# Altium PCB Secondary_MCU_Lidar_Robot.PcbDoc
Units mm, origin at the board's own origin, x right, y up, seen from the top; angles counter-clockwise.
Board outline 90.93 x 99.57 mm, 2 copper layers (Top Layer, Bottom Layer); 12 components, 36 nets, 196 pads, 15 vias.
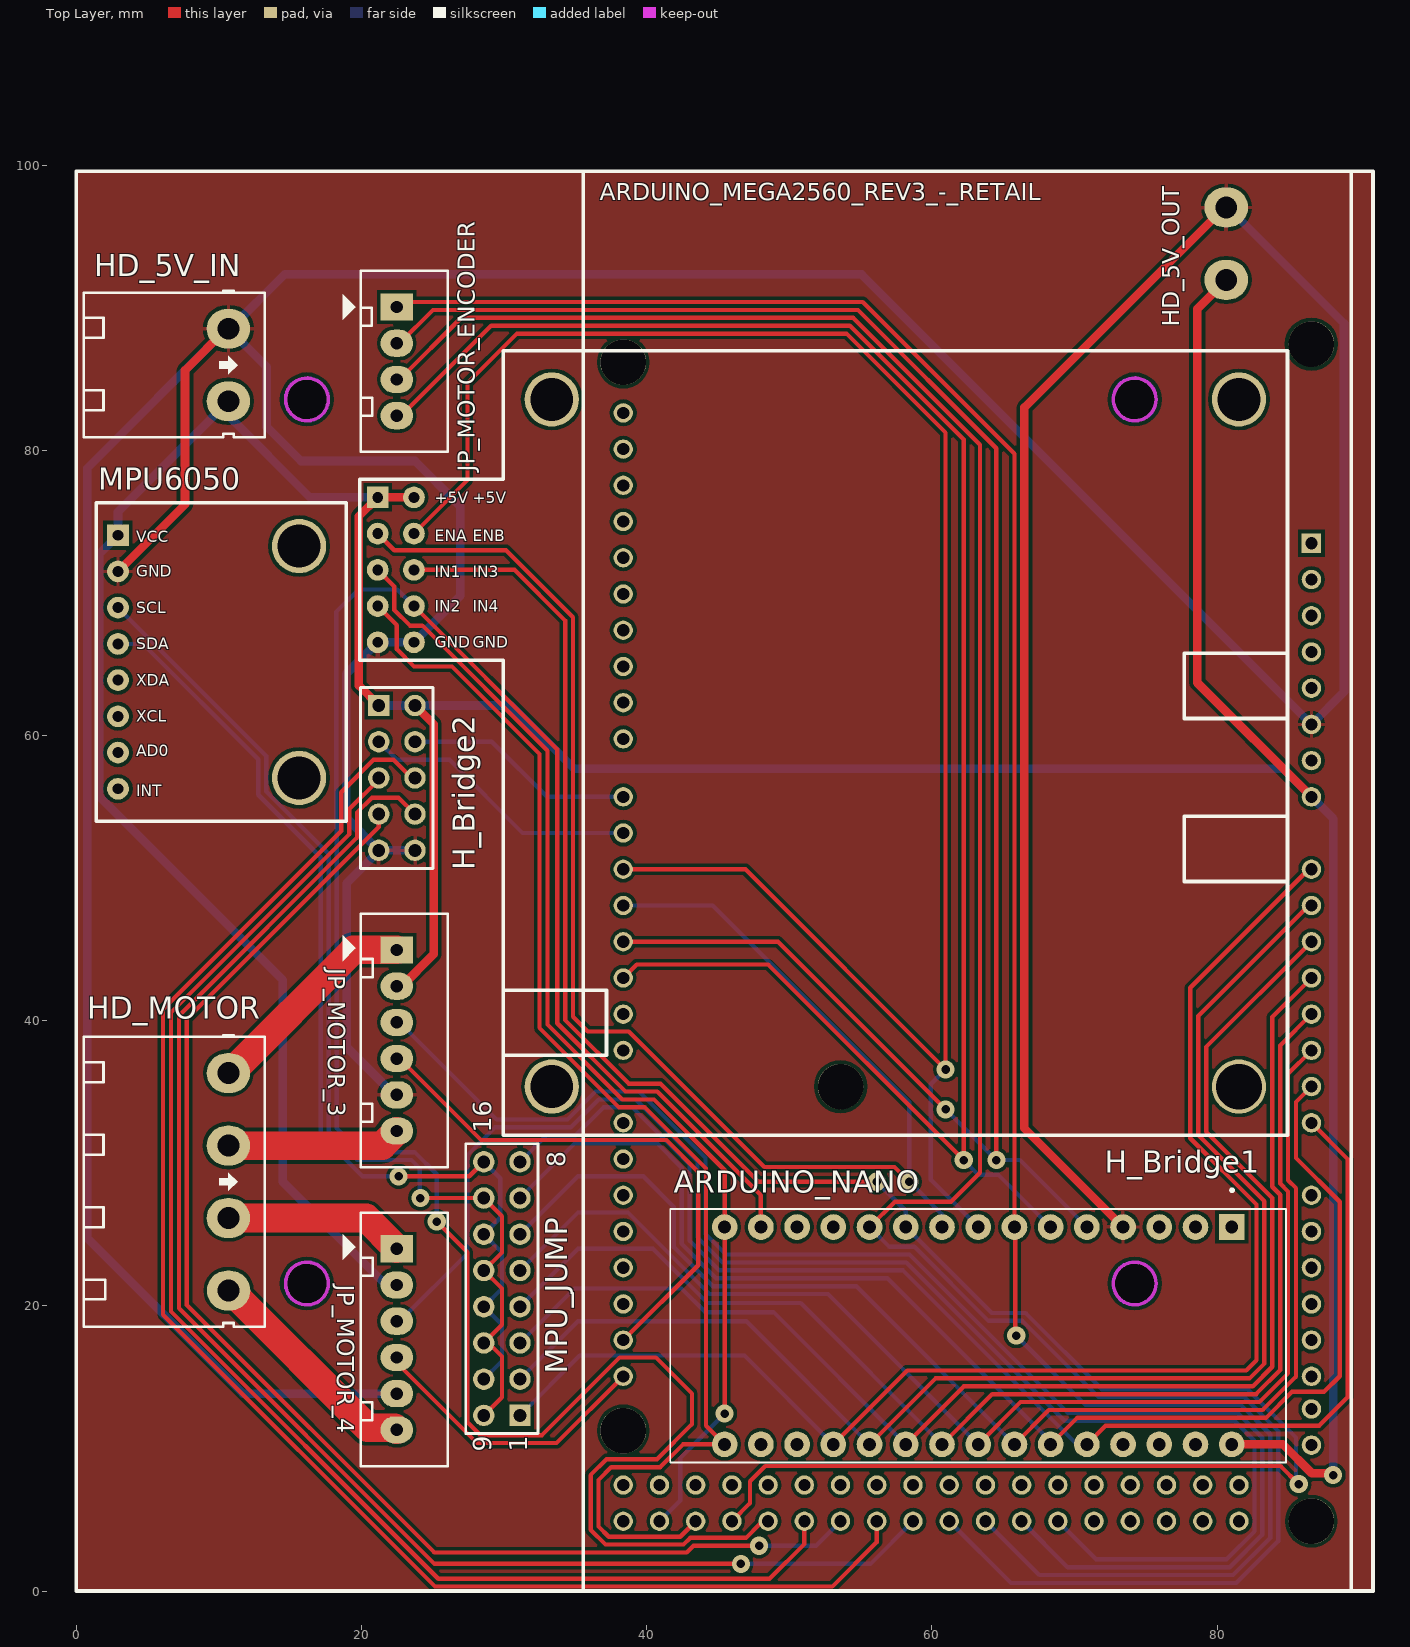
[diagram p0: Top Layer view]
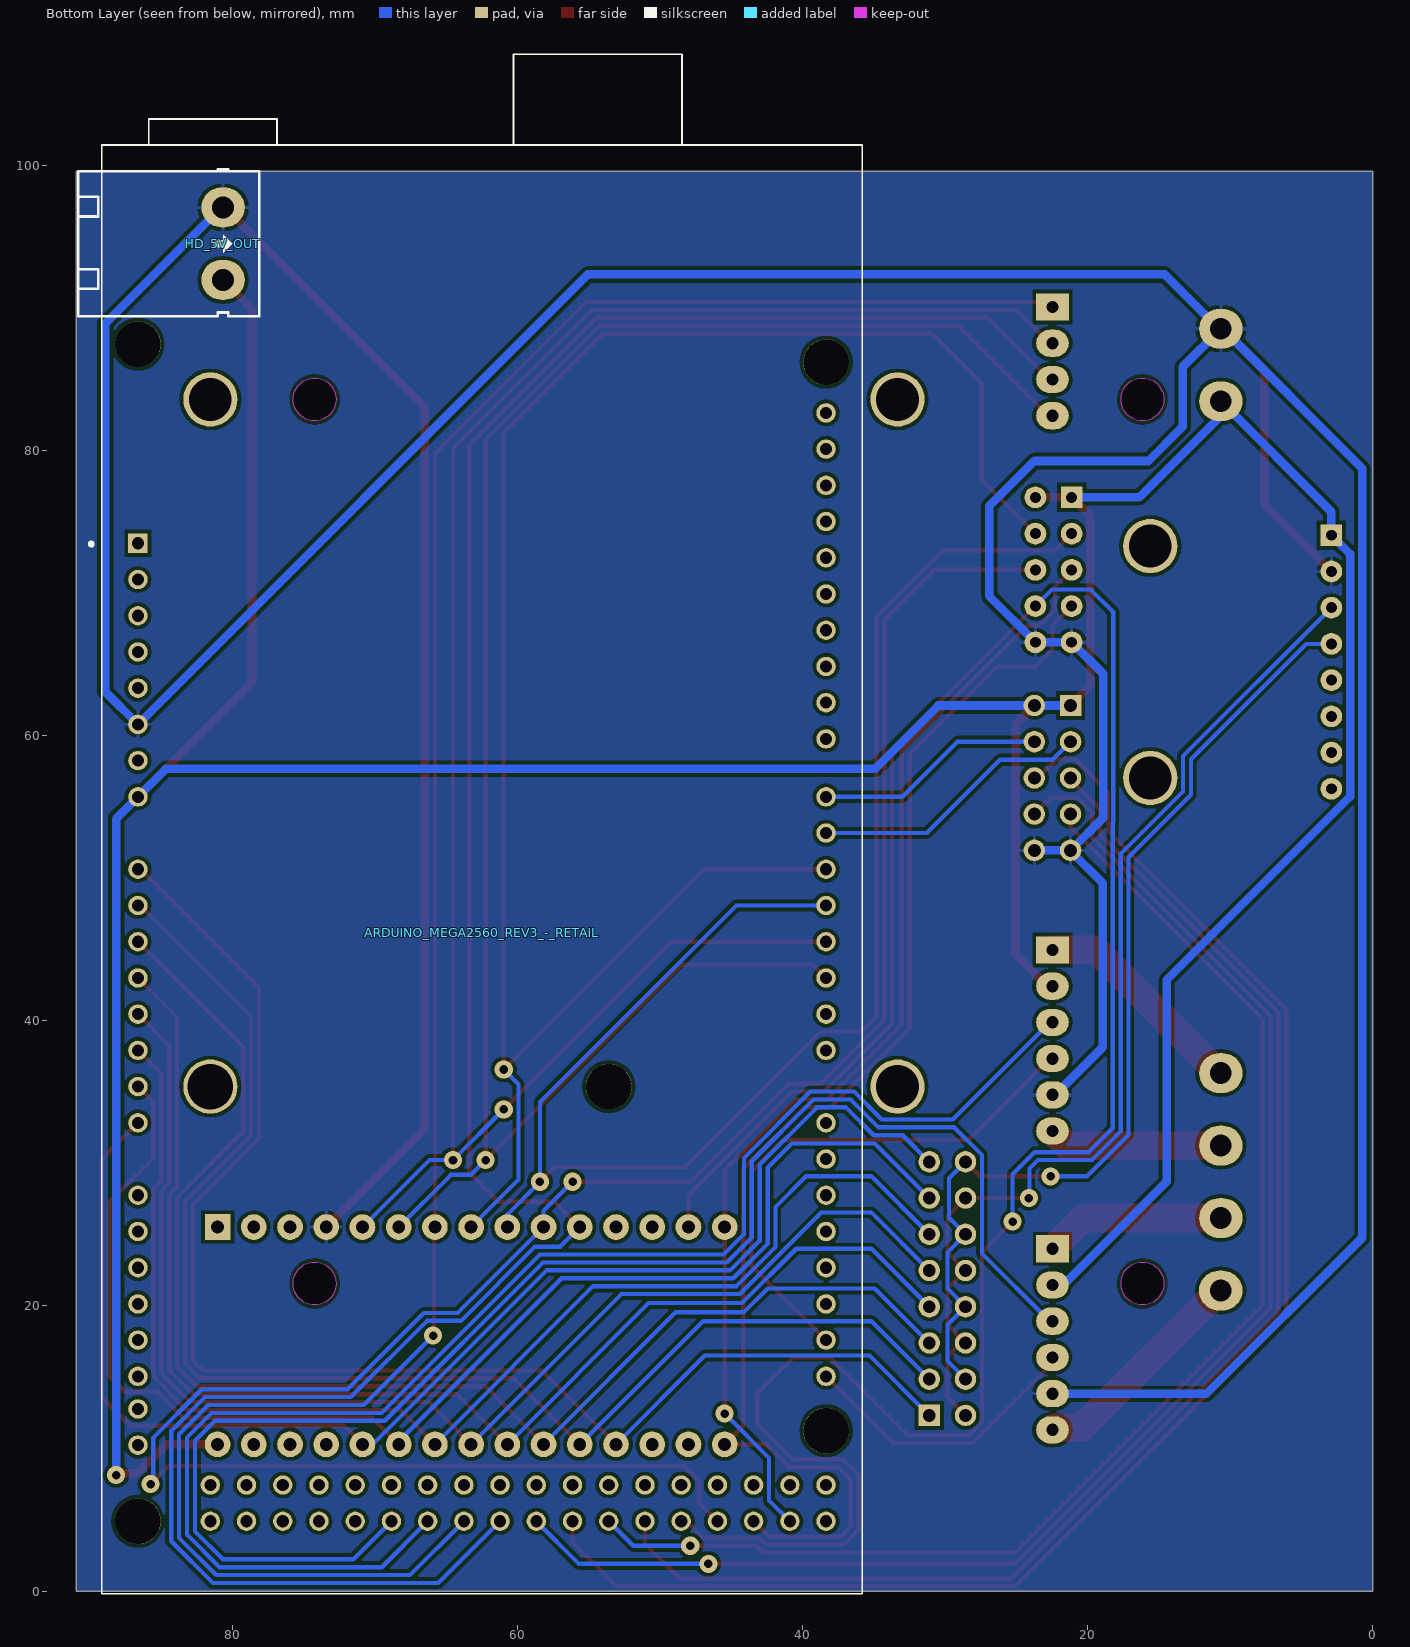
[diagram p1: Bottom Layer view, seen from below]

## Layer stack, top to bottom
Top Solder: solder mask 0.0102, Solder Resist, Dk 3.5
Top Layer: signal copper 0.0356
Dielectric 1: dielectric 0.32, FR-4, Dk 4.8
Bottom Layer: signal copper 0.0356
Bottom Solder: solder mask 0.0102, Solder Resist, Dk 3.5

## Board outline
0,0 90.932,0 90.932,99.568 0,99.568
cut-out: 72.721,83.566 ccw(c74.221,83.566) 74.221,82.066 ccw(c74.221,83.566) 75.721,83.566 ccw(c74.221,83.566) 74.221,85.066 ccw(c74.221,83.566)
cut-out: 14.671,83.566 ccw(c16.171,83.566) 16.171,82.066 ccw(c16.171,83.566) 17.671,83.566 ccw(c16.171,83.566) 16.171,85.066 ccw(c16.171,83.566)
cut-out: 14.671,21.566 ccw(c16.171,21.566) 16.171,20.066 ccw(c16.171,21.566) 17.671,21.566 ccw(c16.171,21.566) 16.171,23.066 ccw(c16.171,21.566)
cut-out: 72.721,21.566 ccw(c74.221,21.566) 74.221,20.066 ccw(c74.221,21.566) 75.721,21.566 ccw(c74.221,21.566) 74.221,23.066 ccw(c74.221,21.566)

## Design rules (kind name [scope] priority, off if disabled: settings)
Clearance [All] p1: gap=0.254 ignorepadtopadclearanceinfootprint=FALSE except(0: Arc-Hole Track-Hole SMDPad-Hole THPad-Hole Via-Hole Fill-Hole Poly-Hole Region-Hole Text-Hole)
PolygonConnect [All] p1: connectstyle=Relief reliefconductorwidth=0.254 reliefentries=4 polygonreliefangle="90 Angle" airgapwidth=0.254
RoutingVias [All] p1: holewidth=0.6 width=1.27 viastyle="Through Hole" minholewidth=0.3 minwidth=1.27 maxholewidth=0.711 maxwidth=1.27
SolderMaskExpansion [All] p1: expansion=0.102
Width [All] p1: maxlimit=0.6 minlimit=0.15 preferedwidth=0.3
30 further rules are at their usual default settings.

## Components (designator, comment, footprint, x,y, rotation, side; value= is the part's Value field where it differs from the comment)
ARDUINO_MEGA2560_REV3_-_RETAIL "ARDUINO_MEGA2560_REV3_-_RETAIL" ARDUINO_MEGA2560_REV3_-_RETAIL 62.484,50.616 r180 bottom
ARDUINO_NANO "ARDUINO_NANO" SHIELD_ARDUINO_NANO 63.246,17.907 r270 top
H_Bridge1 "H_Bridge" XY-160D 29.944,31.976 r0 top
H_Bridge2 "Header 5X2A" HDR2X5_CEN 21.209,62.103 r270 top
HD_5V_IN "Header 2" HED2T 10.668,88.519 r270 top
HD_5V_OUT "Header 2" HED2T 80.645,97.028 r270 bottom
HD_MOTOR "Header 4" HED4T 10.668,36.322 r270 top
JP_MOTOR_3 "JP6" CON6 22.479,44.958 r270 top value="Connector 6"
JP_MOTOR_4 "JP6" CON6 22.479,24.003 r270 top value="Connector 6"
JP_MOTOR_ENCODER "JP4" CON4 22.479,90.043 r270 top value="Connector 4"
MPU6050 "MPU6050" MPU6050 1.397,76.327 r270 top
MPU_JUMP "Header 8X2A" HDR2X8_CEN 31.115,12.319 r90 top

## Footprints (in the part's own frame and the unit in brackets; to place one, negate y for a bottom-side part, rotate by r counter-clockwise, add the part's x,y. Pads: shape width x height; smd on the part's side, far side on the other; paste and mask are expansions set on the pad)
ARDUINO_MEGA2560_REV3_-_RETAIL [mm]
  round 1.358 hole 0.85: 0(24.13,-12.7) 1(24.13,-10.16) 2(24.13,-7.62) 3(24.13,-5.08) 3V3(-24.13,15.24) 4(24.13,-2.54) 5(24.13,0) 5V_1(-24.13,12.7) 5V_2(24.13,-43.18) 5V_3(24.13,-45.72) 6(24.13,2.54) 7(24.13,5.08) 8(24.13,9.144) 9(24.13,11.684) 10(24.13,14.224) 11(24.13,16.764) 12(24.13,19.304) 13(24.13,21.844) 14(24.13,-17.78) 15(24.13,-20.32) 16(24.13,-22.86) 17(24.13,-25.4) 18(24.13,-27.94) 19(24.13,-30.48) 20(24.13,-33.02) 21(24.13,-35.56) 22(21.59,-43.18) 23(21.59,-45.72) 24(19.05,-43.18) 25(19.05,-45.72) 26(16.51,-43.18) 27(16.51,-45.72) 28(13.97,-43.18) 29(13.97,-45.72) 30(11.43,-43.18) 31(11.43,-45.72) 32(8.89,-43.18) 33(8.89,-45.72) 34(6.35,-43.18) 35(6.35,-45.72) 36(3.81,-43.18) 37(3.81,-45.72) 38(1.27,-43.18) 39(1.27,-45.72) 40(-1.27,-43.18) 41(-1.27,-45.72) 42(-3.81,-43.18) 43(-3.81,-45.72) 44(-6.35,-43.18) 45(-6.35,-45.72) 46(-8.89,-43.18) 47(-8.89,-45.72) 48(-11.43,-43.18) 49(-11.43,-45.72) 50(-13.97,-43.18) 51(-13.97,-45.72) 52(-16.51,-43.18) 53(-16.51,-45.72) AD0(-24.13,0) AD1(-24.13,-2.54) AD2(-24.13,-5.08) AD3(-24.13,-7.62) AD4(-24.13,-10.16) AD5(-24.13,-12.7) AD6(-24.13,-15.24) AD7(-24.13,-17.78) AD8(-24.13,-22.86) AD9(-24.13,-25.4) AD10(-24.13,-27.94) AD11(-24.13,-30.48) AD12(-24.13,-33.02) AD13(-24.13,-35.56) AD14(-24.13,-37.846) AD15(-24.13,-40.386) AREF(24.13,26.924) GND1(-24.13,10.16) GND2(-24.13,7.62) GND3(24.13,24.384) GND4(-19.05,-43.18) GND5(-19.05,-45.72) IOREF(-24.13,20.32) RESET(-24.13,17.78) SCL(24.13,32.004) SDA(24.13,29.464) VIN(-24.13,5.08)
  rect 1.358x1.358 hole 0.85: NC(-24.13,22.86)
  round 3.2 hole 3.2 unplated: ""(-24.13,-45.72) ""(-24.13,36.83) ""(-19.05,-15.24) ""(8.89,-15.24) ""(24.13,-39.37) ""(24.13,35.56)
  silkscreen extent -27.52,-50.8 26.67,57.15
CON4 [mil] "CON4"
  rect 75x90 hole 34: 1(0,0)
  oval 75x90 hole 34: 2(100,0) 3(200,0) 4(300,0)
  silkscreen extent -100,-150 400,140, body extent -90,-90 398,136, height 276
CON6 [mil] "CON6"
  rect 75x90 hole 34: 1(0,0)
  oval 75x90 hole 34: 2(100,0) 3(200,0) 4(300,0) 5(400,0) 6(500,0)
  silkscreen extent -100,-150 600,140
HDR2X5_CEN [mm] "Connector; Header; 5x2 Position"
  rect 1.5x1.5 hole 0.9: 1(0,0)
  round 1.5 hole 0.9: 2(2.54,0) 3(5.08,0) 4(7.62,0) 5(10.16,0) 6(0,2.54) 7(2.54,2.54) 8(5.08,2.54) 9(7.62,2.54) 10(10.16,2.54)
  silkscreen extent -1.27,-1.27 11.43,3.81, body extent -1.27,-1.27 11.43,3.81, height 7
HDR2X8_CEN [mm] "Connector; Header; 8x2 Position"
  rect 1.5x1.5 hole 0.9: 1(0,0)
  round 1.5 hole 0.9: 2(2.54,0) 3(5.08,0) 4(7.62,0) 5(10.16,0) 6(12.7,0) 7(15.24,0) 8(17.78,0) 9(0,2.54) 10(2.54,2.54) 11(5.08,2.54) 12(7.62,2.54) 13(10.16,2.54) 14(12.7,2.54) 15(15.24,2.54) 16(17.78,2.54)
  silkscreen extent -1.27,-1.27 19.05,3.81, body extent -1.27,-1.27 19.05,3.81, height 1.5
HED2T [mil] "Header 2, 2 pin, hight 300mil, Pin to Pin 200, Colour Green"
  oval 110x120 hole 60: 1(0,0) 2(200,0)
  silkscreen extent -105,-400 300,100, body extent -97,-399 297,73, height 334
HED4T [mil] "Header 4, 4 pin, hight 300mil, Pin to Pin 200, Colour Green"
  oval 110x120 hole 60: 1(0,0) 2(200,0) 3(400.06,0.06) 4(600.39,0.39)
  silkscreen extent -105,-400 700,100, body extent -87,-406 690,66, height 334
MPU6050 [mil]
  round 60 hole 30: 1(790,60) 2(690,60) 3(590,60) 4(490,60) 5(390,60) 6(290,60) 7(190,60)
  rect 60x60 hole 30: 8(90,60)
  round 149.61 hole 118.11: 13(120,560) 14(760,560)
  silkscreen extent 0,0 880,690
SHIELD_ARDUINO_NANO [mm]
  rect 1.8x1.8 hole 0.9: 1(-7.62,17.78)
  round 1.8 hole 0.9: 2(-7.62,15.24) 3(-7.62,12.7) 4(-7.62,10.16) 5(-7.62,7.62) 6(-7.62,5.08) 7(-7.62,2.54) 8(-7.62,0) 9(-7.62,-2.54) 10(-7.62,-5.08) 11(-7.62,-7.62) 12(-7.62,-10.16) 13(-7.62,-12.7) 14(-7.62,-15.24) 15(-7.62,-17.78) 16(7.62,-17.78) 17(7.62,-15.24) 18(7.62,-12.7) 19(7.62,-10.16) 20(7.62,-7.62) 21(7.62,-5.08) 22(7.62,-2.54) 23(7.62,0) 24(7.62,2.54) 25(7.62,5.08) 26(7.62,7.62) 27(7.62,10.16) 28(7.62,12.7) 29(7.62,15.24) 30(7.62,17.78)
  silkscreen extent -10.3,-21.59 8.89,21.59
XY-160D [mm] "H BRIDGE"
  rect 1.524x1.524 hole 0.762: 1(-8.81,44.72)
  round 1.524 hole 0.762: 2(-8.81,42.18) 3(-8.81,39.64) 4(-8.81,37.1) 5(-8.81,34.56) 6(-6.27,44.72) 7(-6.27,42.18) 8(-6.27,39.64) 9(-6.27,37.1) 10(-6.27,34.56)
  round 3.8 hole 3: 11(3.4,51.59) 12(3.4,3.4) 13(51.59,51.59) 14(51.59,3.4)
  silkscreen extent -10.08,0 54.99,54.99

## Part data
ARDUINO_MEGA2560_REV3_-_RETAIL: "Dev.kit: Arduino; SPI, TWI, UART; ICSP, USB B, pin strips, supply", Package=None, Availability=Unavailable, MF=Arduino, MP="ARDUINO MEGA2560 REV3 - RETAIL", Price=None, SnapEDA_Link=https://www.snapeda.com/parts/ARDUINO%20MEGA2560%20REV3%20-%20RETAIL/Arduino/view-part/1128250/?ref=snap
ARDUINO_NANO: "ATSAMD21G18A Arduino Nano 33 IoT SAM D ARM® Cortex®-M0+ MCU 32-Bit Embedded Evaluation Board", Package=None, Availability=Unavailable, MF=Arduino, MP="ARDUINO NANO", Price=None, SnapEDA_Link=https://www.snapeda.com/parts/ARDUINO%20NANO/Arduino/view-part/1128261/?ref=snap
H_Bridge1: library part "Driver H Bridge XY160D"
H_Bridge2: "Header, 5-Pin, Dual row", LatestRevisionDate=17-Jul-2002, LatestRevisionNote="Re-released for DXP Platform.", Publisher="Altium Limited"
HD_5V_IN HD_5V_OUT: library part Hed2, "Header 2 (Green)"
HD_MOTOR: library part Hed4, "Header 4 (Green)"
JP_MOTOR_3 JP_MOTOR_4: library part Con6, "Connector 6"
JP_MOTOR_ENCODER: library part Con4, "Connector 4"
MPU_JUMP: "Header, 8-Pin, Dual row", LatestRevisionDate=17-Jul-2002, LatestRevisionNote="Re-released for DXP Platform.", Publisher="Altium Limited"

## Via types
v1: diameter 1.27, hole 0.6, Top Layer to Bottom Layer, 15 vias

## Nets (pads, with @x,y where several pads share a name; then routed paths per layer and width w, separated by ;. In a path a pad name is that pad's centre, name@x,y a point inside that pad or via, vN(x,y) a via of type N, cw(c..) or ccw(c..) an arc to the next point about the centre after c; other vN are vias at no path point)
5V: ARDUINO_MEGA2560_REV3_-_RETAIL.VIN ARDUINO_NANO.30 H_Bridge1.1 H_Bridge1.6 H_Bridge2.1 H_Bridge2.6 HD_5V_IN.2 HD_5V_OUT.2 JP_MOTOR_3.2 JP_MOTOR_4.2 MPU6050.8 | length 293.1
  Top Layer w0.6: H_Bridge2.1 19.818,63.494 19.818,75.38 H_Bridge1.1 H_Bridge1.6 ; JP_MOTOR_3.2 22.818,42.418 25.053,44.653 25.053,60.799 H_Bridge2.6 ; HD_5V_OUT.2 78.613,89.916 78.613,63.697 ARDUINO_MEGA2560_REV3_-_RETAIL.VIN ; ARDUINO_NANO.30 84.612,10.287 86.643,8.256 88.01,8.256 v1(88.138,8.128)
  Bottom Layer w0.6: H_Bridge1.1 16.395,76.696 10.668,82.423 HD_5V_IN.2 2.921,75.692 MPU6050.8 1.605,72.725 1.605,55.716 14.478,42.843 14.478,28.702 21.717,21.463 JP_MOTOR_4.2 ; H_Bridge2.1 H_Bridge2.6 30.48,62.103 34.925,57.658 84.652,57.658 ARDUINO_MEGA2560_REV3_-_RETAIL.VIN 88.138,54.172 88.138,10.01 v1(88.138,8.128)
A0: ARDUINO_MEGA2560_REV3_-_RETAIL.AD0 ARDUINO_NANO.19 MPU_JUMP.1 | length 98.4
  Top Layer w0.3: ARDUINO_NANO.19 58.268,15.469 82.047,15.469 82.761,16.183 82.761,27.108 78.122,31.747 78.122,42.308 86.43,50.616 ARDUINO_MEGA2560_REV3_-_RETAIL.AD0
  Bottom Layer w0.3: MPU_JUMP.1 35.309,16.513 46.86,16.513 ARDUINO_NANO.19
A1: ARDUINO_MEGA2560_REV3_-_RETAIL.AD1 ARDUINO_NANO.20 MPU_JUMP.2 | length 97.2
  Top Layer w0.3: ARDUINO_NANO.20 60.254,14.915 82.277,14.915 83.315,15.953 83.315,27.338 78.676,31.977 78.676,40.322 86.43,48.076 ARDUINO_MEGA2560_REV3_-_RETAIL.AD1
  Bottom Layer w0.3: MPU_JUMP.2 35.179,18.923 46.99,18.923 ARDUINO_NANO.20
A2: ARDUINO_MEGA2560_REV3_-_RETAIL.AD2 ARDUINO_NANO.21 MPU_JUMP.3 | length 95.9
  Top Layer w0.3: ARDUINO_NANO.21 62.24,14.361 82.506,14.361 83.869,15.724 83.869,27.567 79.23,32.206 79.23,38.152 ARDUINO_MEGA2560_REV3_-_RETAIL.AD2
  Bottom Layer w0.3: MPU_JUMP.3 34.935,21.219 42.446,21.219 44.107,19.558 48.895,19.558 ARDUINO_NANO.21
A3: ARDUINO_MEGA2560_REV3_-_RETAIL.AD3 ARDUINO_NANO.22 MPU_JUMP.4 | length 91.7
  Top Layer w0.3: ARDUINO_NANO.22 64.226,13.807 82.736,13.807 84.423,15.494 84.423,27.797 83.869,28.351 83.869,40.251 ARDUINO_MEGA2560_REV3_-_RETAIL.AD3
  Bottom Layer w0.3: MPU_JUMP.4 35.179,24.003 40.445,24.003 44.255,20.193 50.8,20.193 ARDUINO_NANO.22
A4: ARDUINO_MEGA2560_REV3_-_RETAIL.AD4 ARDUINO_NANO.23 MPU_JUMP.5 | length 90.7
  Top Layer w0.3: ARDUINO_NANO.23 66.212,13.253 82.965,13.253 84.977,15.265 84.977,28.026 84.423,28.58 84.423,38.265 ARDUINO_MEGA2560_REV3_-_RETAIL.AD4
  Bottom Layer w0.3: MPU_JUMP.5 35.179,26.543 38.689,26.543 44.404,20.828 52.705,20.828 ARDUINO_NANO.23
A5: ARDUINO_MEGA2560_REV3_-_RETAIL.AD5 ARDUINO_NANO.24 MPU_JUMP.6 | length 91.3
  Top Layer w0.3: ARDUINO_NANO.24 68.198,12.699 83.194,12.699 85.531,15.036 85.531,28.256 84.977,28.81 84.977,36.279 ARDUINO_MEGA2560_REV3_-_RETAIL.AD5
  Bottom Layer w0.3: MPU_JUMP.6 35.179,29.083 39.751,29.083 41.899,26.935 41.899,24.116 44.633,21.382 54.691,21.382 ARDUINO_NANO.24
A6: ARDUINO_MEGA2560_REV3_-_RETAIL.AD6 ARDUINO_NANO.25 MPU_JUMP.7 | length 95.1
  Top Layer w0.3: ARDUINO_NANO.25 70.184,12.145 83.424,12.145 85.249,13.97 87.503,13.97 88.6,15.067 88.6,27.302 85.531,30.371 85.531,34.293 ARDUINO_MEGA2560_REV3_-_RETAIL.AD6
  Bottom Layer w0.3: MPU_JUMP.7 34.935,31.379 40.757,31.379 42.453,29.683 42.453,24.345 44.862,21.936 56.89,21.936 68.326,10.5 ARDUINO_NANO.25
A7: ARDUINO_MEGA2560_REV3_-_RETAIL.AD7 ARDUINO_NANO.26 MPU_JUMP.8 | length 94.2
  Top Layer w0.3: ARDUINO_NANO.26 72.17,11.591 87.156,11.591 89.154,13.589 89.154,30.296 ARDUINO_MEGA2560_REV3_-_RETAIL.AD7
  Bottom Layer w0.3: MPU_JUMP.8 32.98,31.964 35.012,31.964 36.967,33.919 39,33.919 43.007,29.912 43.007,24.575 45.092,22.49 57.967,22.49 70.17,10.287 ARDUINO_NANO.26
C1/A1: ARDUINO_MEGA2560_REV3_-_RETAIL.2 ARDUINO_NANO.6 JP_MOTOR_ENCODER.4 | length 134.2
  Top Layer w0.3: JP_MOTOR_ENCODER.4 22.779,82.423 29.09,88.734 54.247,88.734 62.23,80.751 62.23,38.308 v1(62.23,30.226) 48.514,43.942 39.3,43.942 ARDUINO_MEGA2560_REV3_-_RETAIL.2
  Bottom Layer w0.3: v1(62.23,30.226) 63.269,29.187 64.666,29.187 ARDUINO_NANO.6
C1/A2: ARDUINO_MEGA2560_REV3_-_RETAIL.3 ARDUINO_NANO.5 JP_MOTOR_ENCODER.2 | length 137.7
  Top Layer w0.3: JP_MOTOR_ENCODER.2 22.669,87.503 25.009,89.842 54.811,89.842 64.516,80.137 v1(64.516,30.226) ; ARDUINO_MEGA2560_REV3_-_RETAIL.3 49.206,45.536 v1(60.96,33.782)
  Bottom Layer w0.3: v1(60.96,33.782) v1(64.516,30.226) 66.167,30.226 ARDUINO_NANO.5
C1/A3: ARDUINO_MEGA2560_REV3_-_RETAIL.20 JP_MOTOR_3.4 | length 38.4
  Top Layer w0.3: JP_MOTOR_3.4 22.669,37.338 28.384,31.623 41.381,31.623 43.608,29.396 43.608,22.85 ARDUINO_MEGA2560_REV3_-_RETAIL.20
C1/A4: ARDUINO_MEGA2560_REV3_-_RETAIL.21 JP_MOTOR_4.4 | length 20.5
  Top Layer w0.3: JP_MOTOR_4.4 22.479,16 28.1,10.379 33.677,10.379 ARDUINO_MEGA2560_REV3_-_RETAIL.21
C2/B1: ARDUINO_MEGA2560_REV3_-_RETAIL.39 ARDUINO_NANO.11 JP_MOTOR_ENCODER.3 | length 175.1
  Top Layer w0.3: JP_MOTOR_ENCODER.3 22.669,84.963 26.995,89.288 54.476,89.288 63.373,80.391 63.373,33.147 63.373,29.337 61.341,27.305 57.404,27.305 ARDUINO_NANO.11
  Bottom Layer w0.3: ARDUINO_NANO.11 57.001,24.152 58.758,24.152 63.964,18.946 66.343,18.946 71.689,13.6 81.908,13.6 84.279,11.229 84.279,3.497 81.346,0.564 65.546,0.564 ARDUINO_MEGA2560_REV3_-_RETAIL.39
C2/B2: ARDUINO_MEGA2560_REV3_-_RETAIL.41 ARDUINO_NANO.7 JP_MOTOR_ENCODER.1 | length 160.3
  Top Layer w0.3: JP_MOTOR_ENCODER.1 22.832,90.396 55.146,90.396 65.786,79.756 ARDUINO_NANO.7 65.849,25.464 65.849,17.971 v1(65.913,17.907)
  Bottom Layer w0.3: ARDUINO_MEGA2560_REV3_-_RETAIL.41 67.532,1.118 81.116,1.118 83.725,3.727 83.725,10.999 81.678,13.046 70.774,13.046 v1(65.913,17.907)
C2/B3: ARDUINO_MEGA2560_REV3_-_RETAIL.43 JP_MOTOR_3.3 | length 103.5
  Bottom Layer w0.3: JP_MOTOR_3.3 22.669,39.878 29.475,33.072 34.448,33.072 36.403,35.027 39.459,35.027 44.115,30.371 44.115,25.034 45.551,23.598 58.426,23.598 69.532,12.492 81.449,12.492 83.171,10.77 83.171,3.956 80.887,1.672 69.518,1.672 ARDUINO_MEGA2560_REV3_-_RETAIL.43
C2/B4: ARDUINO_MEGA2560_REV3_-_RETAIL.45 JP_MOTOR_4.3 | length 105.7
  Bottom Layer w0.3: JP_MOTOR_4.3 22.669,18.923 27.421,23.675 27.421,30.577 29.362,32.518 34.677,32.518 36.632,34.473 39.23,34.473 43.561,30.142 43.561,24.804 45.321,23.044 58.197,23.044 69.303,11.938 81.219,11.938 82.617,10.54 82.617,4.186 80.657,2.226 71.504,2.226 ARDUINO_MEGA2560_REV3_-_RETAIL.45
GND: ARDUINO_MEGA2560_REV3_-_RETAIL.GND1 ARDUINO_NANO.4 H_Bridge1.5 H_Bridge1.10 H_Bridge2.5 H_Bridge2.10 HD_5V_IN.1 HD_5V_OUT.1 JP_MOTOR_3.5 JP_MOTOR_4.5 MPU6050.7 | length 401.9
  Top Layer w0.6: MPU6050.7 7.62,76.2 7.62,85.598 10.541,88.519 HD_5V_IN.1 ; ARDUINO_NANO.4 66.49,32.443 66.49,83 80.518,97.028 HD_5V_OUT.1
  Bottom Layer w0.6: HD_5V_IN.1@10.795,88.519 14.605,92.329 55.061,92.329 ARDUINO_MEGA2560_REV3_-_RETAIL.GND1 88.9,63.062 88.9,88.9 80.772,97.028 HD_5V_OUT.1 ; JP_MOTOR_4.5 11.684,13.843 0.751,24.776 0.751,78.729 10.541,88.519 HD_5V_IN.1 13.335,85.852 13.335,81.661 15.748,79.248 23.749,79.248 26.924,76.073 26.924,69.786 H_Bridge1.10 H_Bridge1.5 18.923,64.325 18.923,54.229 H_Bridge2.5 ; JP_MOTOR_3.5 22.288,34.798 18.957,38.13 18.957,49.644 21.209,51.896 H_Bridge2.5 ; H_Bridge2.10 H_Bridge2.5
M1_1: ARDUINO_MEGA2560_REV3_-_RETAIL.23 ARDUINO_NANO.15 H_Bridge1.3 | length 80.5
  Top Layer w0.3: H_Bridge1.3 22.3,70.45 22.3,68.801 23.399,67.702 24.265,67.702 33.039,58.928 33.039,39.723 38.289,34.473 40.505,34.473 45.466,29.512 ARDUINO_NANO.15 v1(45.466,12.446)
  Bottom Layer w0.3: ARDUINO_MEGA2560_REV3_-_RETAIL.23 42.351,6.353 42.351,9.331 v1(45.466,12.446)
M1_2: ARDUINO_MEGA2560_REV3_-_RETAIL.25 ARDUINO_NANO.16 H_Bridge1.4 | length 91.9
  Top Layer w0.3: H_Bridge1.4 22.479,67.731 22.479,66.04 23.687,64.832 26.351,64.832 32.485,58.699 32.485,39.494 38.059,33.919 39.868,33.919 44.162,29.625 44.162,11.591 ARDUINO_NANO.16 ; ARDUINO_MEGA2560_REV3_-_RETAIL.25 42.351,3.813 37.335,3.813 36.622,4.526 36.622,7.793 37.517,8.688 40.946,8.688 42.545,10.287 ARDUINO_NANO.16@45.212,10.287
M2_1: ARDUINO_MEGA2560_REV3_-_RETAIL.27 ARDUINO_NANO.10 H_Bridge1.8 | length 150.3
  Top Layer w0.3: H_Bridge1.8 30.725,71.616 34.279,68.061 34.279,40.05 38.748,35.581 40.964,35.581 47.843,28.702 v1(56.134,28.702) ; ARDUINO_MEGA2560_REV3_-_RETAIL.27 47.244,6.166 47.244,7.698 48.309,8.763 84.455,8.763 v1(85.725,7.493)
  Bottom Layer w0.3: v1(56.134,28.702) 58.166,26.67 ARDUINO_NANO.10 64.193,19.5 66.573,19.5 71.919,14.154 82.137,14.154 85.531,10.76 85.531,7.687 v1(85.725,7.493) v1@85.707,7.493
M2_2: ARDUINO_MEGA2560_REV3_-_RETAIL.29 ARDUINO_NANO.14 H_Bridge1.9 | length 171.9
  Top Layer w0.3: H_Bridge1.9 33.725,59.025 33.725,39.82 38.518,35.027 40.735,35.027 48.006,27.756 ARDUINO_NANO.14 ; v1(25.273,25.908) 27.421,23.76 27.421,11.841 28.329,10.933 32.65,10.933 38.1,16.383 40.64,16.383 43.18,13.843 43.18,11.705 40.717,9.242 37.182,9.242 36.068,8.128 36.068,4.297 37.106,3.259 42.58,3.259 43.05,3.729 46.964,3.729 47.928,4.694 48.312,4.694 ARDUINO_MEGA2560_REV3_-_RETAIL.29
  Bottom Layer w0.3: H_Bridge1.9 22.508,70.242 19.801,70.242 18.219,68.66 18.219,53.937 18.253,53.903 18.253,32.463 19.936,30.78 23.724,30.78 25.273,29.231 v1(25.273,25.908)
M3_1: ARDUINO_MEGA2560_REV3_-_RETAIL.31 H_Bridge2.3 | length 98.4
  Top Layer w0.3: H_Bridge2.3 21.334,57.023 19.131,54.82 19.131,53.064 6.639,40.572 6.639,19.607 25.38,0.866 48.618,0.866 51.054,3.302 ARDUINO_MEGA2560_REV3_-_RETAIL.31
M3_2: ARDUINO_MEGA2560_REV3_-_RETAIL.33 H_Bridge2.4 | length 93.9
  Top Layer w0.3: H_Bridge2.4 21.209,53.575 7.747,40.113 7.747,20.066 25.108,2.705 42.81,2.705 43.28,3.175 v1(47.879,3.175)
  Bottom Layer w0.3: v1(47.879,3.175) 51.873,3.175 ARDUINO_MEGA2560_REV3_-_RETAIL.33
M4_1: ARDUINO_MEGA2560_REV3_-_RETAIL.35 H_Bridge2.8 | length 109.2
  Top Layer w0.3: H_Bridge2.8 23.517,57.023 22.247,58.293 20.847,58.293 18.577,56.023 18.577,53.293 6.085,40.801 6.085,19.378 25.151,0.312 53.017,0.312 56.134,3.429 ARDUINO_MEGA2560_REV3_-_RETAIL.35
M4_2: ARDUINO_MEGA2560_REV3_-_RETAIL.37 H_Bridge2.9 | length 105.1
  Top Layer w0.3: H_Bridge2.9 22.595,55.637 20.731,55.637 19.685,54.591 19.685,52.834 7.193,40.342 7.193,19.837 25.125,1.905 v1(46.609,1.905)
  Bottom Layer w0.3: v1(46.609,1.905) 55.683,1.905 ARDUINO_MEGA2560_REV3_-_RETAIL.37
OUT3_1: HD_MOTOR.4 JP_MOTOR_4.6 | length 15.8
  Top Layer w2: HD_MOTOR.4 10.805,21.072 20.436,11.441 22.341,11.441 JP_MOTOR_4.6
OUT3_2: HD_MOTOR.3 JP_MOTOR_4.1 | length 12.7
  Top Layer w2: HD_MOTOR.3 20.322,26.16 JP_MOTOR_4.1
OUT4_1: HD_MOTOR.2 JP_MOTOR_3.6 | length 12.2
  Top Layer w2: HD_MOTOR.2 21.463,31.242 JP_MOTOR_3.6
OUT4_2: HD_MOTOR.1 JP_MOTOR_3.1 | length 15.4
  Top Layer w2: HD_MOTOR.1 10.795,36.322 19.431,44.958 JP_MOTOR_3.1
PWM1: ARDUINO_MEGA2560_REV3_-_RETAIL.4 ARDUINO_NANO.9 H_Bridge1.2 | length 108
  Top Layer w0.3: H_Bridge1.2 22.3,72.99 30.134,72.99 34.833,68.291 34.833,40.279 35.869,39.243 38.735,39.243 48.237,29.741 57.381,29.741 v1(58.42,28.702)
  Bottom Layer w0.3: ARDUINO_MEGA2560_REV3_-_RETAIL.4 44.634,48.076 58.42,34.29 v1(58.42,28.702) 60.706,26.416 ARDUINO_NANO.9
PWM2: ARDUINO_MEGA2560_REV3_-_RETAIL.5 ARDUINO_NANO.8 H_Bridge1.7 | length 135.9
  Top Layer w0.3: H_Bridge1.7 27.432,77.914 27.432,84.709 30.903,88.18 54.017,88.18 60.96,81.237 v1(60.96,36.576) 46.92,50.616 ARDUINO_MEGA2560_REV3_-_RETAIL.5
  Bottom Layer w0.3: v1(60.96,36.576) 59.921,35.537 59.921,28.852 ARDUINO_NANO.8
PWM3: ARDUINO_MEGA2560_REV3_-_RETAIL.6 H_Bridge2.2 | length 19.8
  Bottom Layer w0.3: H_Bridge2.2 22.479,58.293 26.162,58.293 31.299,53.156 ARDUINO_MEGA2560_REV3_-_RETAIL.6
PWM4: ARDUINO_MEGA2560_REV3_-_RETAIL.7 H_Bridge2.7 | length 16.2
  Bottom Layer w0.3: H_Bridge2.7 29.137,59.563 33.004,55.696 ARDUINO_MEGA2560_REV3_-_RETAIL.7
SCL: MPU6050.6 MPU_JUMP.9 MPU_JUMP.11 MPU_JUMP.13 MPU_JUMP.15 | length 75.4
  Top Layer w0.3: v1(24.13,27.559) MPU_JUMP.15 29.845,26.289 29.845,23.749 MPU_JUMP.13 29.845,21.209 29.845,18.669 MPU_JUMP.11 28.9,17.399 29.845,16.454 29.845,13.589 MPU_JUMP.9
  Bottom Layer w0.3: MPU6050.6 13.317,58.565 13.317,56.069 17.699,51.687 17.699,32.233 19.706,30.226 23.495,30.226 24.084,29.637 24.084,27.605 v1(24.13,27.559)
SDA: MPU6050.5 MPU_JUMP.10 MPU_JUMP.12 MPU_JUMP.14 MPU_JUMP.16 | length 72.7
  Top Layer w0.3: v1(22.606,29.083) 27.559,29.083 MPU_JUMP.16
  Bottom Layer w0.3: MPU6050.5 4.678,66.421 12.763,58.336 12.763,55.839 17.145,51.457 17.145,32.004 20.066,29.083 v1(22.606,29.083) ; MPU_JUMP.10 29.845,16.129 29.845,18.669 MPU_JUMP.12 29.845,21.209 29.845,23.749 MPU_JUMP.14 29.729,26.173 29.729,28.945 MPU_JUMP.16
pads on no net: ARDUINO_MEGA2560_REV3_-_RETAIL. ARDUINO_MEGA2560_REV3_-_RETAIL.0 ARDUINO_MEGA2560_REV3_-_RETAIL.1 ARDUINO_MEGA2560_REV3_-_RETAIL.3V3 ARDUINO_MEGA2560_REV3_-_RETAIL.5V_1 ARDUINO_MEGA2560_REV3_-_RETAIL.5V_2 ARDUINO_MEGA2560_REV3_-_RETAIL.5V_3 ARDUINO_MEGA2560_REV3_-_RETAIL.8 ARDUINO_MEGA2560_REV3_-_RETAIL.9 ARDUINO_MEGA2560_REV3_-_RETAIL.10 ARDUINO_MEGA2560_REV3_-_RETAIL.11 ARDUINO_MEGA2560_REV3_-_RETAIL.12 ARDUINO_MEGA2560_REV3_-_RETAIL.13 ARDUINO_MEGA2560_REV3_-_RETAIL.14 ARDUINO_MEGA2560_REV3_-_RETAIL.15 ARDUINO_MEGA2560_REV3_-_RETAIL.16 ARDUINO_MEGA2560_REV3_-_RETAIL.17 ARDUINO_MEGA2560_REV3_-_RETAIL.18 ARDUINO_MEGA2560_REV3_-_RETAIL.19 ARDUINO_MEGA2560_REV3_-_RETAIL.22 ARDUINO_MEGA2560_REV3_-_RETAIL.24 ARDUINO_MEGA2560_REV3_-_RETAIL.26 ARDUINO_MEGA2560_REV3_-_RETAIL.28 ARDUINO_MEGA2560_REV3_-_RETAIL.30 ARDUINO_MEGA2560_REV3_-_RETAIL.32 ARDUINO_MEGA2560_REV3_-_RETAIL.34 ARDUINO_MEGA2560_REV3_-_RETAIL.36 ARDUINO_MEGA2560_REV3_-_RETAIL.38 ARDUINO_MEGA2560_REV3_-_RETAIL.40 ARDUINO_MEGA2560_REV3_-_RETAIL.42 ARDUINO_MEGA2560_REV3_-_RETAIL.44 ARDUINO_MEGA2560_REV3_-_RETAIL.46 ARDUINO_MEGA2560_REV3_-_RETAIL.47 ARDUINO_MEGA2560_REV3_-_RETAIL.48 ARDUINO_MEGA2560_REV3_-_RETAIL.49 ARDUINO_MEGA2560_REV3_-_RETAIL.50 ARDUINO_MEGA2560_REV3_-_RETAIL.51 ARDUINO_MEGA2560_REV3_-_RETAIL.52 ARDUINO_MEGA2560_REV3_-_RETAIL.53 ARDUINO_MEGA2560_REV3_-_RETAIL.AD8 ARDUINO_MEGA2560_REV3_-_RETAIL.AD9 ARDUINO_MEGA2560_REV3_-_RETAIL.AD10 ARDUINO_MEGA2560_REV3_-_RETAIL.AD11 ARDUINO_MEGA2560_REV3_-_RETAIL.AD12 ARDUINO_MEGA2560_REV3_-_RETAIL.AD13 ARDUINO_MEGA2560_REV3_-_RETAIL.AD14 ARDUINO_MEGA2560_REV3_-_RETAIL.AD15 ARDUINO_MEGA2560_REV3_-_RETAIL.AREF ARDUINO_MEGA2560_REV3_-_RETAIL.GND2 ARDUINO_MEGA2560_REV3_-_RETAIL.GND3 ARDUINO_MEGA2560_REV3_-_RETAIL.GND4 ARDUINO_MEGA2560_REV3_-_RETAIL.GND5 ARDUINO_MEGA2560_REV3_-_RETAIL.IOREF ARDUINO_MEGA2560_REV3_-_RETAIL.NC ARDUINO_MEGA2560_REV3_-_RETAIL.RESET ARDUINO_MEGA2560_REV3_-_RETAIL.SCL ARDUINO_MEGA2560_REV3_-_RETAIL.SDA ARDUINO_NANO.1 ARDUINO_NANO.2 ARDUINO_NANO.3 ARDUINO_NANO.12 ARDUINO_NANO.13 ARDUINO_NANO.17 ARDUINO_NANO.18 ARDUINO_NANO.27 ARDUINO_NANO.28 ARDUINO_NANO.29 H_Bridge1.11 H_Bridge1.12 H_Bridge1.13 H_Bridge1.14 MPU6050.1 MPU6050.2 MPU6050.3 MPU6050.4 MPU6050.13 MPU6050.14
copper on no net: | length 0.2
  Bottom Layer w0.6: 78.486,10.287 78.683,10.287

## Polygon pours and split planes (outlines as drawn)
GND on Top Layer (solid, pour order 8): 0,99.568 90.932,99.568 90.932,0 0,0
no net on Top Layer "Top Layer-No Net" (solid, pour order 4): 0.508,116.967
GND on Bottom Layer (solid, pour order 6): 0,99.568 90.932,99.568 90.932,0 0,0

## Keep-outs
Top Layer:
  circle w0.254: c74.221,83.566 r1.5
  circle w0.254: c16.171,83.566 r1.5
  circle w0.254: c16.171,21.566 r1.5
  circle w0.254: c74.221,21.566 r1.5

## Other copper
Bottom Layer:
  region net GND: 89.662,57.728

## Silkscreen, mask and mechanical layers (free items; w line width, h text height)
Top Overlay:
  lines w0.254: 35.56,0 35.56,99.568 ; 89.408,0 89.408,99.568 ; 0,0 0,99.568 90.932,99.568 90.932,0 0,0

## Text inside footprints (layer, text, board x,y; h text height)
H_Bridge1: Top Overlay "+5V" at 25.118,76.299 h0.8; Top Overlay "ENA" at 25.118,73.632 h0.8; Top Overlay "IN1" at 25.118,71.092 h0.8; Top Overlay "IN2" at 25.118,68.679 h0.8; Top Overlay "GND" at 25.118,66.139 h0.8; Top Overlay "+5V" at 27.785,76.299 h0.8; Top Overlay "ENB" at 27.785,73.632 h0.8; Top Overlay "IN3" at 27.785,71.092 h0.8; Top Overlay "IN4" at 27.785,68.679 h0.8; Top Overlay "GND" at 27.785,66.139 h0.8
MPU6050: Top Overlay "VCC" at 4.191,73.533 h0.8; Top Overlay "GND" at 4.191,71.12 h0.8; Top Overlay "SCL" at 4.191,68.58 h0.8; Top Overlay "SDA" at 4.191,66.04 h0.8; Top Overlay "XDA" at 4.191,63.5 h0.8; Top Overlay "XCL" at 4.191,60.96 h0.8; Top Overlay "AD0" at 4.191,58.547 h0.8; Top Overlay "INT" at 4.191,55.753 h0.8
MPU_JUMP: Top Overlay "9" at 29.083,9.779 h1.27 r90; Top Overlay "1" at 31.623,9.779 h1.27 r90; Top Overlay "8" at 34.29,29.718 h1.27 r90; Top Overlay "16" at 29.083,32.131 h1.27 r90